# Altium PCB XmasLights.PcbDoc
Units mm, origin at the board's own origin, x right, y up, seen from the top; angles counter-clockwise.
Board outline 80 x 65 mm, 2 copper layers (Top Layer, Bottom Layer), stack 1.57 mm thick; 89 components, 60 nets, 366 pads, 244 vias.
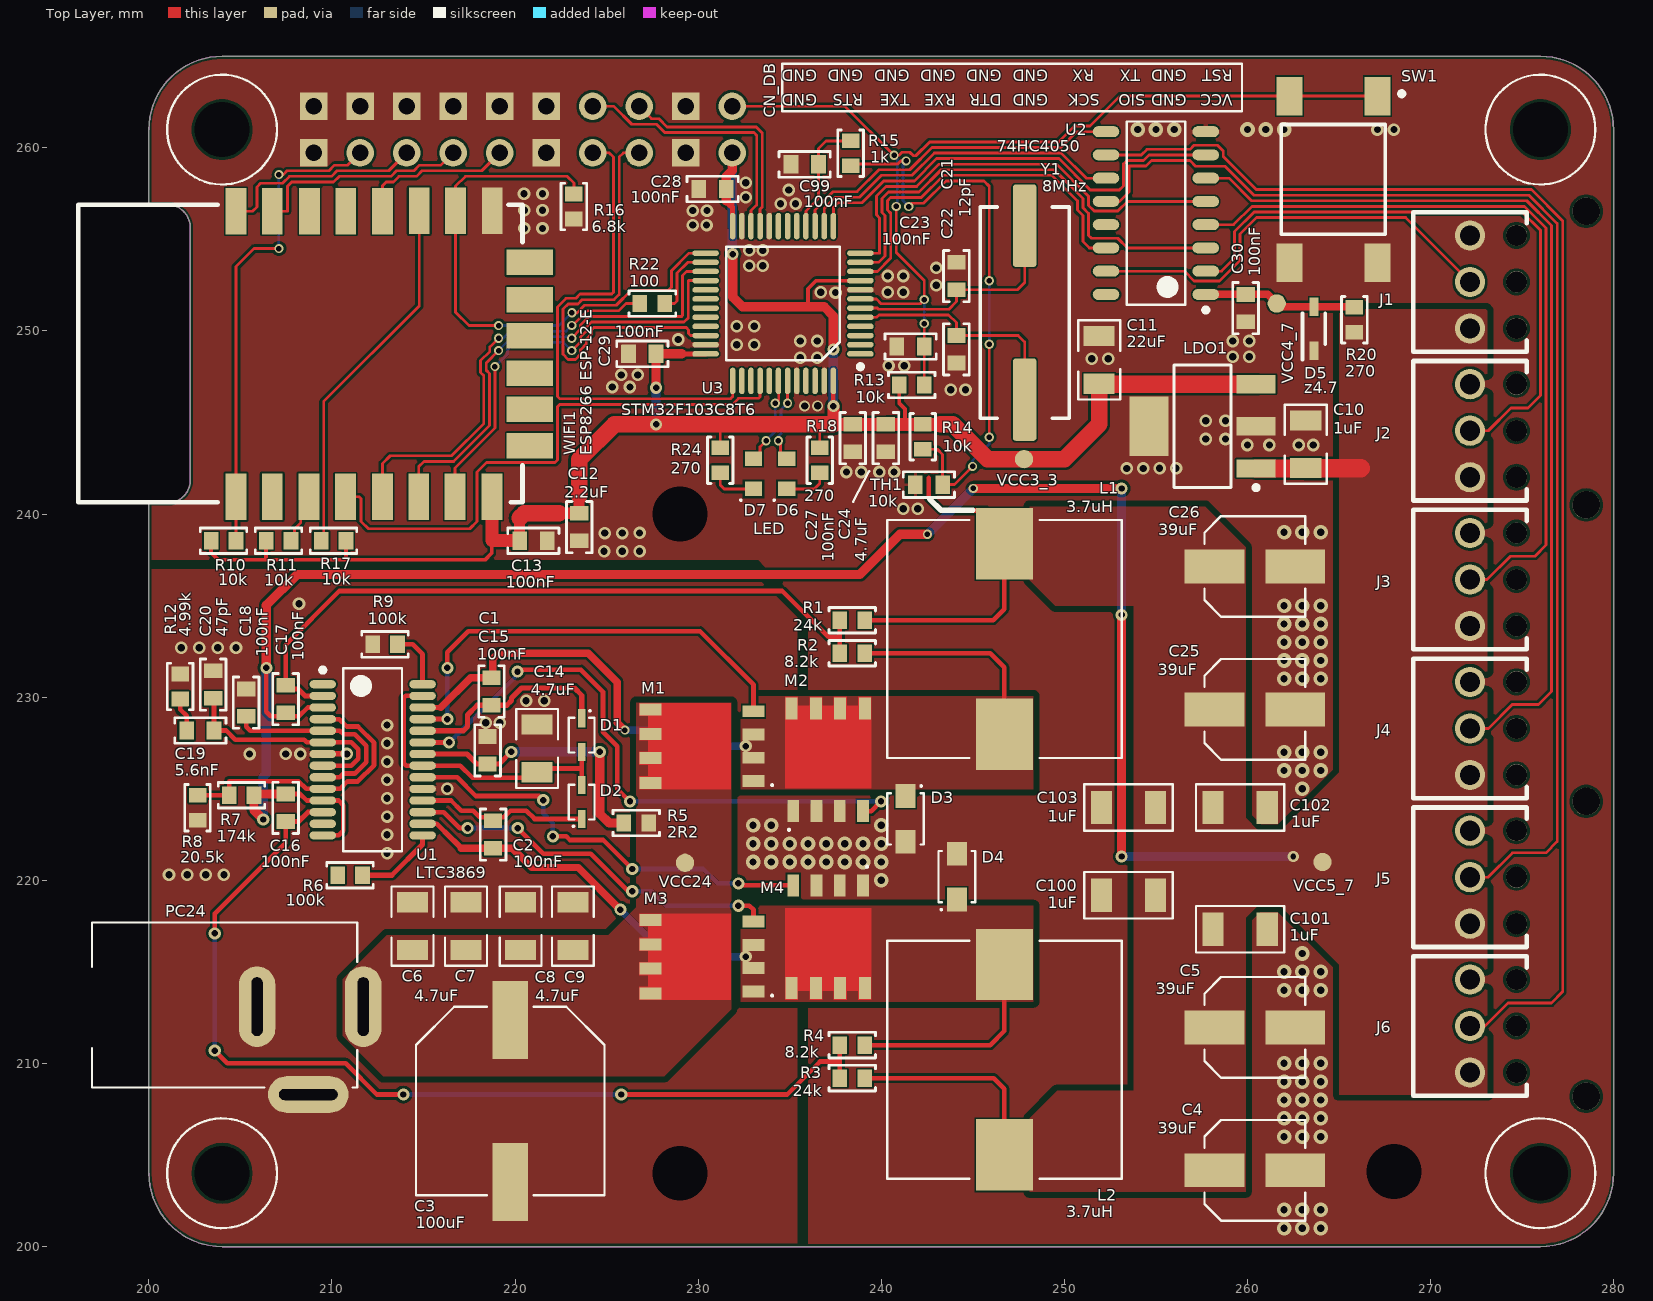
[diagram p0: Top Layer view]
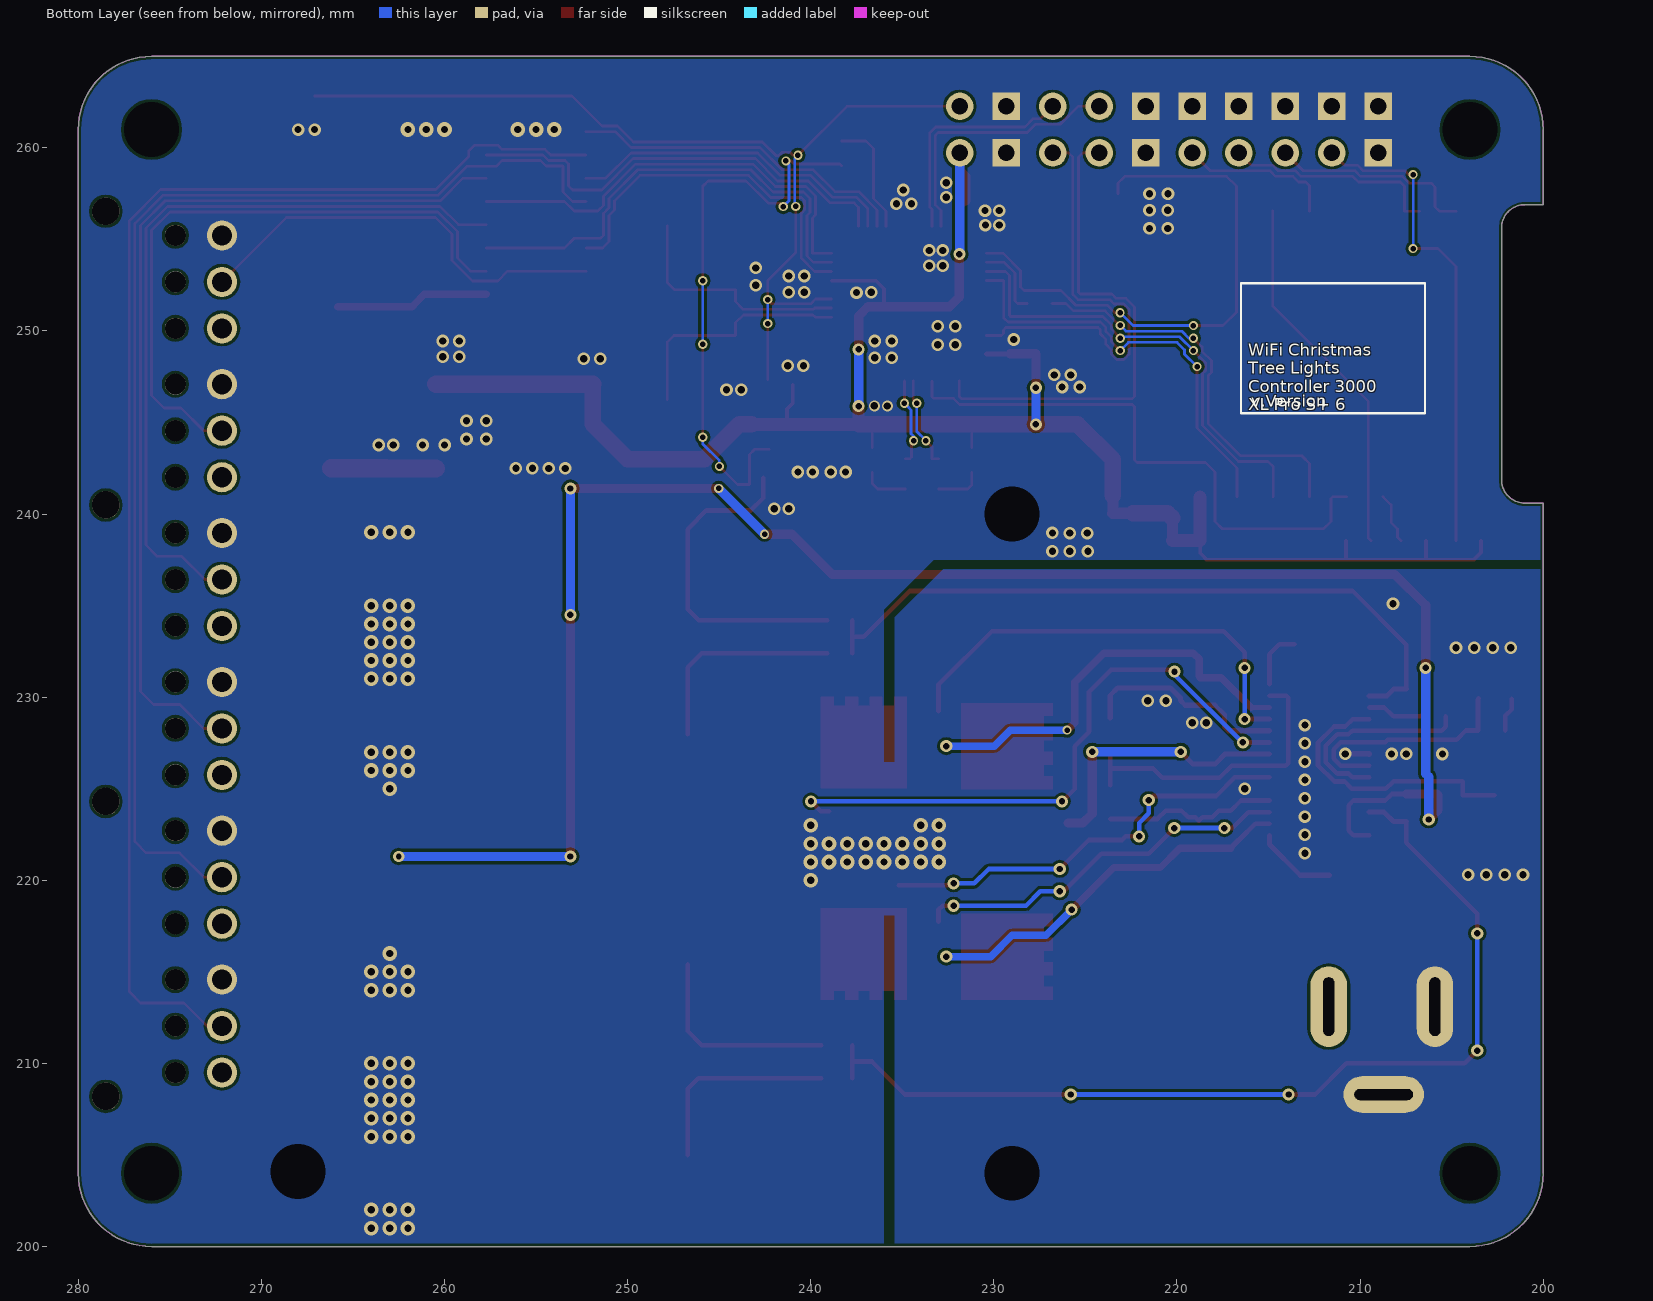
[diagram p1: Bottom Layer view, seen from below]
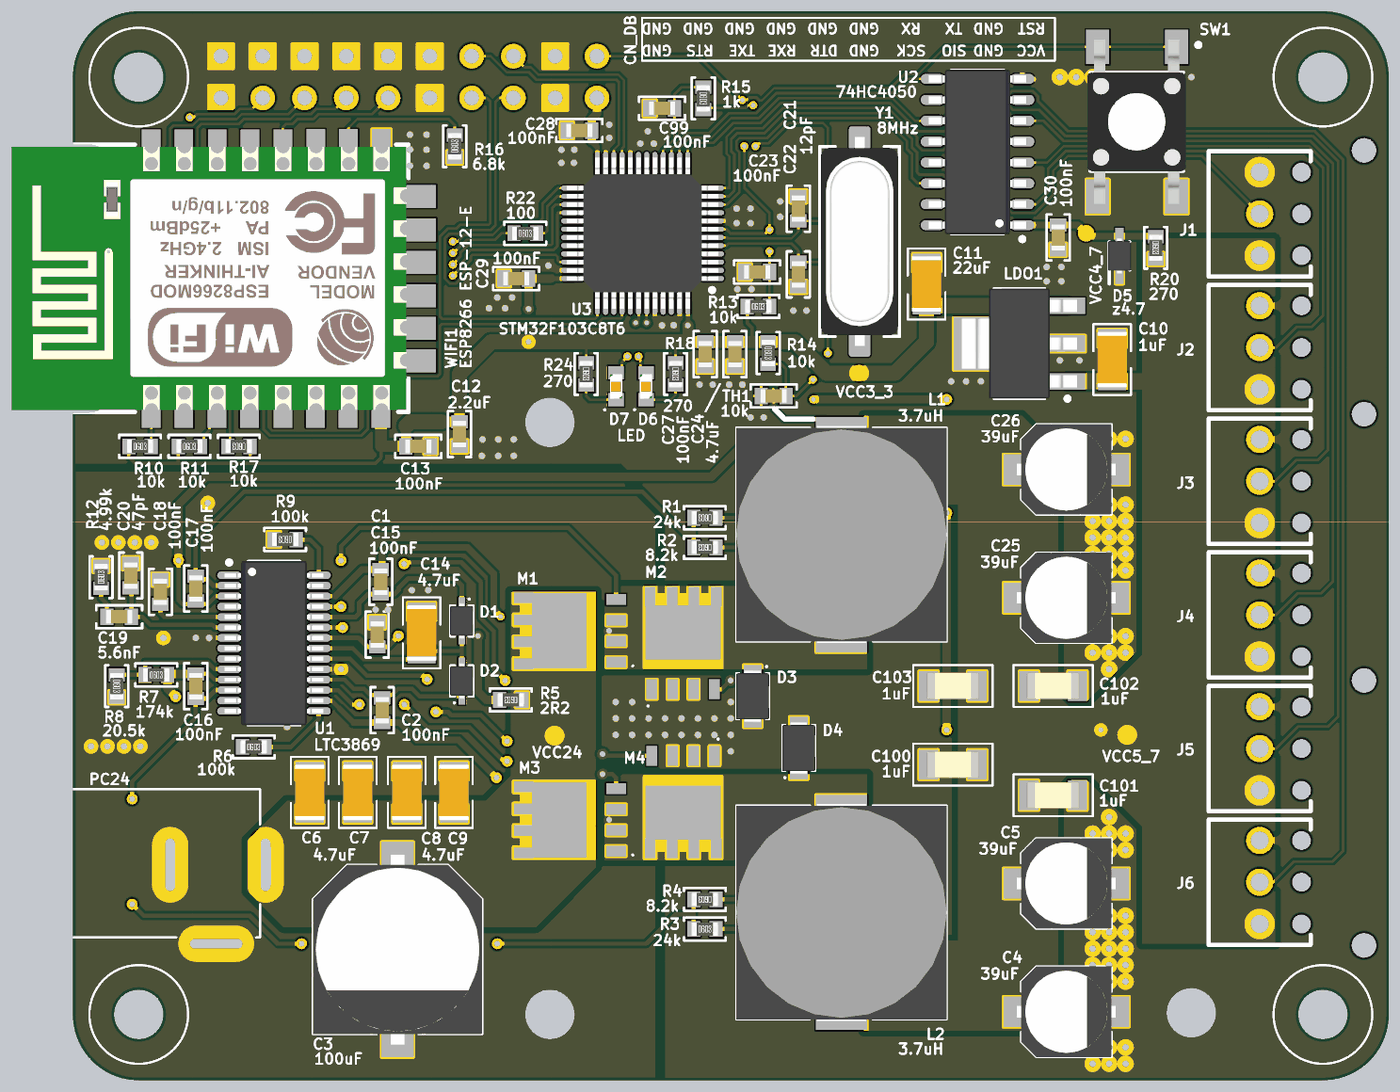
[diagram p2: 3D render of the assembled board from above, using the file's embedded part models]

## Layer stack, top to bottom
Top Solder: solder mask 0.01, Solder Resist, Dk 3.5
Top Layer: signal copper 0.035
Dielectric 1: dielectric 1.5, FR-4, Dk 4.8
Bottom Layer: signal copper 0.035
Bottom Solder: solder mask 0.01, Solder Resist, Dk 3.5

## Board outline
200,204 200,240.6 201,240.6 ccw(c201,241.87) 202.27,241.87 202.27,255.63 ccw(c201,255.63) 201,256.9 200,256.9 200,261 cw(c204,261) 204,265 276,265 cw(c276,261) 280,261 280,204 cw(c276,204) 276,200 204,200 cw(c204,204)

## Design rules (kind name [scope] priority, off if disabled: settings)
Clearance Clearance_VOUT_TOP [(InComponent('L1') OR InComponent('L2')) AND (InNet('VOUT') OR InNet('SW1') OR InNet('SW2')) vs InNet('GND')] p1: gap=0.152 except(0.305: SMDPad-Poly; 0.5: Poly-Poly)
Clearance [All] p2: gap=0.152 except(0.102: SMDPad-Poly; 0.35: Poly-Poly)
HoleSize [All] p1: absolutevalues=TRUE maxlimit=4 minlimit=0.025 maxpercent=80.000 minpercent=20.000
MinimumAnnularRing [All] p1: minimumring=0.076
MinimumSolderMaskSliver [All] p1: minsoldermaskwidth=0.152
NetAntennae NetAntennae_HEAT [InNet('VCC5_7')] p1: netantennaetolerance=1.5
NetAntennae [All] p2: netantennaetolerance=0
PolygonConnect PolygonConnect_TH1 [InComponent('TH1')] p1: connectstyle=Relief reliefconductorwidth=0.152 reliefentries=4 polygonreliefangle="90 Angle" airgapwidth=0.152
PolygonConnect PolygonConnect_J12 [InNet('GND') vs HasFootprint('DC_CON') OR HasFootprint('CAPAE6053X59M') OR InComponent('TP1')] p2: connectstyle=Direct reliefconductorwidth=0.254 reliefentries=4 polygonreliefangle="90 Angle" airgapwidth=0.254
PolygonConnect PolygonConnect_GND_PADS [InNet('GND') vs InComponent('U?')] p3: connectstyle=Relief reliefconductorwidth=0.279 reliefentries=4 polygonreliefangle="90 Angle" airgapwidth=0.102
PolygonConnect PolygonConnect_VIN [InNet('VCC24') or InNet('SW1') or InNet('SW2') or InNet('VCC5_7') or ((IsVia OR IsPad) ANd InNet('GND'))] p4: connectstyle=Direct reliefconductorwidth=0.254 reliefentries=4 polygonreliefangle="90 Angle" airgapwidth=0.152
PolygonConnect [All] p5: connectstyle=Relief reliefconductorwidth=0.254 reliefentries=4 polygonreliefangle="90 Angle" airgapwidth=0.152
RoutingVias [All] p1: holewidth=0.3 width=0.5 viastyle="Through Hole" minholewidth=0.3 minwidth=0.5 maxholewidth=1 maxwidth=1.372
SilkToSilkClearance [All vs False] p1: silktosilkclearance=0.254
SilkToSolderMaskClearance [False] p1: minsilkscreentomaskgap=0.254 clearancetoexposedcopper=TRUE
SolderMaskExpansion SolderMaskExpansion_via [IsVia] p1: expansion=0
SolderMaskExpansion [All] p2: expansion=0.102
Width [All] p1: maxlimit=1.524 minlimit=0.152 preferedwidth=0.152
25 further rules are at their usual default settings.

## Classes and differential pairs
component class PowerBuck: C1 C2 C3 C4 C5 C6 C7 C8 C9 C14 C15 C16 C17 C18 C19 C20 C25 C26 C100 C101 C102 C103 D1 D2 D3 D4 L1 L2 M1 M2 M3 M4 R1 R2 R3 R4 R5 R6 R7 R8 R9 R12 U1
component class XmasLights: C10 C11 C12 C13 C21 C22 C23 C24 C27 C28 C29 C30 C99 CN1 CN2 CN3 CN4 CN5 CN6 CN_DB D5 D6 D7 J1 J2 J3 J4 J5 J6 LDO1 PC24 R10 R11 R13 R14 R15 R16 R17 R18 R20 R22 R24 SW1 TH1 U2 U3 VCC3_3 VCC4_7 VCC5_7 VCC24 WIFI1 Y1

## Components (designator, comment, footprint, x,y, rotation, side; value= is the part's Value field where it differs from the comment)
C1 "100nF" "CAP 0603/1608" 218.716,230.311 r270 top
C2 "100nF" "CAP 0603/1608" 218.8,222.5 r270 top
C3 "100uF" CAPAE115102X102N 219.737,207.948 r270 top
C4 "39uF" CAPAE6053X59M 260.4,204.162 r0 top
C5 "39uF" CAPAE6053X59M 260.4,211.967 r0 top
C6 "4.7uF" CAP_1206 214.4,217.499 r90 top
C7 "4.7uF" CAP_1206 217.321,217.499 r90 top
C8 "4.7uF" CAP_1206 220.3,217.499 r90 top
C9 "4.7uF" CAP_1206 223.164,217.499 r90 top
C10 "1uF" CAP_1206 263.187,243.819 r90 top
C11 "22uF" CAP_1206 251.901,248.419 r90 top
C12 "2.2uF" "CAP 0603/1608" 223.504,239.292 r270 top
C13 "100nF" "CAP 0603/1608" 221,238.542 r0 top
C14 "4.7uF" CAP_1206 221.2,227.2 r90 top
C15 "100nF" "CAP 0603/1608" 218.5,227.1 r90 top
C16 "100nF" "CAP 0603/1608" 207.469,223.961 r270 top
C17 "100nF" "CAP 0603/1608" 207.469,229.9 r90 top
C18 "100nF" "CAP 0603/1608" 205.316,229.7 r90 top
C19 "5.6nF" "CAP 0603/1608" 202.811,228.181 r180 top
C20 "47pF" "CAP 0603/1608" 203.511,230.685 r90 top
C21 "12pF" "CAP 0603/1608" 244.104,253 r270 top
C22 "12pF" "CAP 0603/1608" 244.104,249 r90 top
C23 "100nF" "CAP 0603/1608" 241.6,249.152 r180 top
C24 "4.7uF" "CAP 0603/1608" 240.25,244.15 r270 top
C25 "39uF" CAPAE6053X59M 260.4,229.336 r0 top
C26 "39uF" CAPAE6053X59M 260.4,237.14 r0 top
C27 "100nF" "CAP 0603/1608" 238.446,244.15 r270 top
C28 "100nF" "CAP 0603/1608" 230.79,257.754 r180 top
C29 "100nF" "CAP 0603/1608" 226.95,248.75 r180 top
C30 "100nF" "CAP 0603/1608" 259.9,251.246 r270 top
C99 "100nF" "CAP 0603/1608" 235.82,259.1 r0 top
C100 "1uF" CAP1206 253.5,219.188 r180 top
C101 "1uF" CAP1206 259.6,217.329 r180 top
C102 "1uF" CAP1206 259.6,223.973 r180 top
C103 "1uF" CAP1206 253.5,223.973 r0 top
CN_DB "CONNECTOR" "Edge Connector" 231.86,259.73 r180 top
D1 "SDM10K45" DIOM1713X11N 223.641,227.929 r270 top
D2 "SDM10K45" DIOM1713X11N 223.641,224.275 r90 top
D3 "SDM10K45" DIOM2618X11N 241.326,223.351 r270 top
D4 "SDM10K45" DIOM2618X11N 244.13,220.2 r90 top
D5 "z4.7" SOD2512X110N 263.631,250.127 r90 top
D6 "LED" Chip2PinSM127P600-8N 234.837,242.2 r90 top
D7 "LED" Chip2PinSM127P600-8N 233.021,242.2 r90 top
J1 "7901092" 7901092 274.695,252.681 r90 top
J2 "7901092" 7901092 274.695,244.553 r90 top
J3 "7901092" 7901092 274.695,236.425 r90 top
J4 "7901092" 7901092 274.695,228.297 r90 top
J5 "7901092" 7901092 274.695,220.168 r90 top
J6 "7901092" 7901092 274.695,212.04 r90 top
L1 "3.7uH" INDP130128X62N 246.726,233.18 r90 top
L2 "3.7uH" INDP130128X62N 246.726,210.2 r270 top
LDO1 "LDO" SOT230P700X180-4N 257.544,244.794 r180 top
M1 "MOSFET-N" INF-PG-TDSON-8-1_V 230.2,227.329 r90 top
M2 "MOSFET-N" INF-PG-TDSON-8-1_V 237.096,226.6 r0 top
M3 "MOSFET-N" INF-PG-TDSON-8-1_V 230.2,215.835 r90 top
M4 "MOSFET-N" INF-PG-TDSON-8-1_V 237.096,216.9 r180 top
PC24 "PWR5.5" DC_CON 208.71,208.3 r0 top
R1 "24k" "RES 0603/1608" 238.421,234.204 r180 top
R2 "8.2k" "RES 0603/1608" 238.421,232.4 r180 top
R3 "24k" "RES 0603/1608" 238.421,209.196 r0 top
R4 "8.2k" "RES 0603/1608" 238.421,211 r180 top
R5 "2R2" "RES 0603/1608" 226.625,223.129 r180 top
R6 "100k" "RES 0603/1608" 210.99,220.275 r0 top
R7 "174k" "RES 0603/1608" 205.064,224.646 r0 top
R8 "20.5k" "RES 0603/1608" 202.66,223.966 r270 top
R9 "100k" "RES 0603/1608" 212.9,232.883 r180 top
R10 "10k" "RES 0603/1608" 204.08,238.542 r0 top
R11 "10k" "RES 0603/1608" 207.084,238.542 r0 top
R12 "4.99k" "RES 0603/1608" 201.707,230.585 r90 top
R13 "10k" "RES 0603/1608" 241.67,247.05 r0 top
R14 "10k" "RES 0603/1608" 242.269,244.22 r270 top
R15 "1k" "RES 0603/1608" 238.324,259.704 r270 top
R16 "6.8k" "RES 0603/1608" 223.214,256.798 r90 top
R17 "10k" "RES 0603/1608" 210.088,238.542 r180 top
R18 "270" "RES 0603/1608" 236.641,242.945 r270 top
R20 "270" "RES 0603/1608" 265.836,250.617 r270 top
R22 "100" "RES 0603/1608" 227.5,251.5 r0 top
R24 "270" "RES 0603/1608" 231.204,242.945 r270 top
SW1 "SWITCH" FSM-SWITCH 264.168,258.916 r0 top
TH1 "10k" "CAP 0603/1608" 242.6,241.609 r0 top
U1 "LTC3869" SOP64P600X175-28N 212.223,226.579 r0 top
U2 "74HC4050" SOIC127P600X175-16N 255,256.441 r180 top
U3 "STM32F103C8T6" CQFP50P900X900X160-48N 234.635,251.5 r180 top
VCC3_3 "TESTPOINT" TESTPOINT 247.8,243 r90 top
VCC4_7 "TESTPOINT" TESTPOINT 261.6,251.5 r90 top
VCC5_7 "TESTPOINT" TESTPOINT 264.1,221 r90 top
VCC24 "TESTPOINT" TESTPOINT 229.286,220.954 r90 top
WIFI1 "ESP8266 ESP-12-E" "ESP8266 ESP-12-E" 221.168,257.53 r90 top
Y1 "8MHz" CRYSTAL 247.834,251 r90 top

## Footprints (in the part's own frame and the unit in brackets; to place one, negate y for a bottom-side part, rotate by r counter-clockwise, add the part's x,y. Pads: shape width x height; smd on the part's side, far side on the other; paste and mask are expansions set on the pad)
7901092 [mm]
  round 1.65 hole 1.1: 1(-2.54,2.54) 2(0,2.54) 3(2.54,2.54)
  round 1.15 hole 1.15 unplated: 4(-2.54,0) 5(0,0) 6(2.54,0)
  silkscreen extent -3.81,-0.56 3.81,5.64
CAP1206 [mm]
  rrect1% 1.16x1.82 smd: 1(1.475,0) 2(-1.475,0)
  silkscreen extent -2.41,-1.27 2.41,1.27, body extent -1.6,-0.81 1.6,0.81, height 0.57
"CAP 0603/1608" [mm] "Chip Capacitor, 2-Leads, Body 1.60x0.80mm, IPC Medium Density"
  rrect1% 0.8x1 smd: 1(-0.75,0) 2(0.75,0)
  silkscreen extent -1.4,-0.7 1.4,0.7, body extent -0.8,-0.41 0.8,0.41, height 0.82
CAP_1206 [mm] "Chip Capacitor, 2-Leads, Body 3.20x1.60mm, IPC High Density"
  rrect1% 1.1x1.7 smd: 1(-1.3,0) 2(1.3,0)
  silkscreen extent -2.16,-1.14 2.16,1.14, body extent -1.7,-0.9 1.7,0.9, height 1
CAPAE6053X59M [mm] "Aluminum Electrolytic Capacitor, Body 5.30x5.30x5.90mm, IPC Low Density"
  rect 3.25x1.85 smd: 1(-2.2,0) 2(2.2,0)
  silkscreen extent -2.75,-2.75 2.75,2.75, body extent -3,-2.75 3,2.75, height 5.9
CAPAE115102X102N [mm] "Aluminum Electrolytic Capacitor, Body 10.25x10.25x10.20mm, IPC Medium Density"
  rect 4.25x1.95 smd: 1(-4.425,0) 2(4.425,0)
  silkscreen extent -5.15,-5.15 5.15,5.15, body extent -5.77,-5.15 5.77,5.15, height 10.2
Chip2PinSM127P600-8N [mm] "SMT LED"
  rect 0.8x0.95 smd: 1(-0.825,0) 2(0.825,0)
  silkscreen extent -1.49,0.64 -1.39,0.74, body extent -0.77,-0.38 0.74,0.38, height 0.17
CQFP50P900X900X160-48N [mm] "CQFP, 48-Leads, Body 9.00x9.00mm, Pitch 0.50mm, IPC Medium Density"
  oval 1.45x0.3 smd: 1(-4.225,2.75) 2(-4.225,2.25) 3(-4.225,1.75) 4(-4.225,1.25) 5(-4.225,0.75) 6(-4.225,0.25) 7(-4.225,-0.25) 8(-4.225,-0.75) 9(-4.225,-1.25) 10(-4.225,-1.75) 11(-4.225,-2.25) 12(-4.225,-2.75) 25(4.225,-2.75) 26(4.225,-2.25) 27(4.225,-1.75) 28(4.225,-1.25) 29(4.225,-0.75) 30(4.225,-0.25) 31(4.225,0.25) 32(4.225,0.75) 33(4.225,1.25) 34(4.225,1.75) 35(4.225,2.25) 36(4.225,2.75)
  oval 0.3x1.45 smd: 13(-2.75,-4.225) 14(-2.25,-4.225) 15(-1.75,-4.225) 16(-1.25,-4.225) 17(-0.75,-4.225) 18(-0.25,-4.225) 19(0.25,-4.225) 20(0.75,-4.225) 21(1.25,-4.225) 22(1.75,-4.225) 23(2.25,-4.225) 24(2.75,-4.225) 37(2.75,4.225) 38(2.25,4.225) 39(1.75,4.225) 40(1.25,4.225) 41(0.75,4.225) 42(0.25,4.225) 43(-0.25,4.225) 44(-0.75,4.225) 45(-1.25,4.225) 46(-1.75,4.225) 47(-2.25,4.225) 48(-2.75,4.225)
  silkscreen extent -4.35,-3.1 3.1,3.57, body extent -4.6,-4.6 4.6,4.6, height 1.45
CRYSTAL [mm] "Crystal, 2-Leads, Body 4.70x11.40mm, Pitch 8.80mm, IPC Medium Density"
  rrect25% 4.5x1.3 smd: 1(-4.75,0) 2(4.75,0)
  silkscreen extent -5.77,-2.43 5.77,2.43, body extent -6.35,-2.35 6.35,2.35, height 4.2
DC_CON [mm]
  oval 2x4.4 hole 0.6 slot 3.2 at 90 deg paste-2.54: 1(3,4.8) 2(-2.8,4.8)
  oval 4.4x2 hole 0.6 slot 3.2 at 0 deg paste-2.54: 3(0,0)
  silkscreen extent -11.81,0.38 2.67,9.4, body extent -11.83,0.43 2.67,9.43, height 10
DIOM1713X11N [mm] "Molded Diode, 2-Leads, Body 1.70x1.30mm, IPC Medium Density"
  rect 1x0.4 smd: 1(-0.925,0) 2(0.925,0)
  silkscreen extent -1.37,-0.7 0.95,0.7, body extent -1.12,-0.7 1.12,0.7, height 1.1
DIOM2618X11N [mm] "Molded Diode, 2-Leads, Body 2.60x1.80mm, IPC Medium Density"
  rect 1.3x1.1 smd: 1(-1.25,0) 2(1.25,0)
  silkscreen extent -1.85,-1 1.4,1, body extent -1.62,-1 1.62,1, height 1.1
"Edge Connector" [mm]
  rrect100% 1.5x1.5 hole 0.9: 1(0,-2.54) 2(5.08,-2.54) 3(7.62,-2.54) 4(0,0) 5(5.08,0) 6(7.62,0) 7(12.7,0) 8(15.24,0) 9(17.78,0) 10(20.32,0)
  rrect1% 1.5x1.5 hole 0.9: 11(2.54,0) 11(2.54,-2.54) 11(10.16,-2.54) 11(10.16,0) 11(12.7,-2.54) 11(15.24,-2.54) 11(17.78,-2.54) 11(20.32,-2.54) 11(22.86,-2.54) 11(22.86,0)
"ESP8266 ESP-12-E" [mil] "ESP8266 ESP-12-E"
  rrect1% 100x45 smd: 1(-653,646) 2(-653,568) 3(-653,489) 4(-653,411) 5(-653,331) 6(-653,253) 7(-653,175) 8(-653,96) 15(-38,95) 16(-38,174) 17(-38,252) 18(-39,331) 19(-39,410) 20(-39,488) 21(-39,568) 22(-39,646)
  rrect1% 55x100 smd: 9(-543,14) 10(-465,14) 11(-387,14) 12(-307,14) 13(-229,14) 14(-149,14)
  silkscreen extent -665,30 -25,985, body extent -660,35 -30,980, height 118
FSM-SWITCH [mm]
  rect 1.4x2.1 smd: 1(-1.869,-5.185) 2(-1.869,3.915) 3(2.931,-5.185) 4(2.931,3.915)
  silkscreen extent -2.32,-3.63 4.38,4.16, body extent -2.49,-5.63 3.51,4.37, height 5.07
INDP130128X62N [mm] "Precision Wire Wound Inductor, 2-Leads, Body 13.00x12.80mm, IPC Medium Density"
  rect 3.9x3.1 smd: 1(-5.2,0) 2(5.2,0)
  silkscreen extent -6.5,-6.4 6.5,6.4, body extent -6.6,-6.4 6.6,6.4, height 6.3
INF-PG-TDSON-8-1_V [mm] "TDSON, 8-Leads, Body 6.15x5.15mm, Pitch 1.27mm"
  rect 0.65x1.2 smd: 1(-1.905,-2.825) 2(-0.635,-2.825) 3(0.635,-2.825) 4(1.905,-2.825) 5(2.007,2.794) 6(0.66,2.794) 7(-0.66,2.794) 8(-2.007,2.794)
  Top Layer region: -2.35,2.925 -2.35,-1.575 2.35,-1.575 2.35,2.925
  Top Layer region: -2.35,2.925 -1.65,2.925 -1.65,3.425 -2.35,3.425
  Top Layer region: 1.65,2.925 2.35,2.925 2.35,3.425 1.65,3.425
  Top Layer region: -1.015,2.925 -0.315,2.925 -0.315,3.425 -1.015,3.425
  Top Layer region: 0.315,2.925 1.015,2.925 1.015,3.425 0.315,3.425
  silkscreen extent -2.23,-3.94 -2.03,-3.74, body extent -2.58,-3.08 2.58,3.08, height 1
"RES 0603/1608" [mm] "Chip Resistor, 2-Leads, Body 1.60x0.80mm, IPC Medium Density"
  rrect1% 0.8x0.95 smd: 1(-0.68,0) 2(0.68,0)
  silkscreen extent -1.27,-0.7 1.27,0.7, body extent -0.8,-0.4 0.8,0.4, height 0.45
SOD2512X110N [mm]
  rect 1x0.5 smd: 1(-1.2,0) 2(1.2,0)
  silkscreen extent -1.7,-0.63 0.85,0.63, body extent -1.12,-0.7 1.12,0.7, height 1.1
SOIC127P600X175-16N [mm] "SOIC, 16-Leads, Body 9.90x3.90mm, Pitch 1.27mm, IPC Medium Density"
  oval 1.45x0.6 smd: 1(-2.725,4.445) 2(-2.725,3.175) 3(-2.725,1.905) 4(-2.725,0.635) 5(-2.725,-0.635) 6(-2.725,-1.905) 7(-2.725,-3.175) 8(-2.725,-4.445) 9(2.725,-4.445) 10(2.725,-3.175) 11(2.725,-1.905) 12(2.725,-0.635) 13(2.725,0.635) 14(2.725,1.905) 15(2.725,3.175) 16(2.725,4.445)
  silkscreen extent -2.85,-5 1.6,5.42, body extent -3,-5 3,5, height 1.75
SOP64P600X175-28N [mm] "SOP, 28-Leads, Body 9.89x3.90mm, Pitch 0.64mm, IPC Medium Density"
  oval 1.45x0.45 smd: 1(-2.725,4.127) 2(-2.725,3.492) 3(-2.725,2.857) 4(-2.725,2.222) 5(-2.725,1.587) 6(-2.725,0.953) 7(-2.725,0.318) 8(-2.725,-0.318) 9(-2.725,-0.953) 10(-2.725,-1.587) 11(-2.725,-2.222) 12(-2.725,-2.857) 13(-2.725,-3.492) 14(-2.725,-4.127) 15(2.725,-4.127) 16(2.725,-3.492) 17(2.725,-2.857) 18(2.725,-2.222) 19(2.725,-1.587) 20(2.725,-0.953) 21(2.725,-0.318) 22(2.725,0.318) 23(2.725,0.953) 24(2.725,1.587) 25(2.725,2.222) 26(2.725,2.857) 27(2.725,3.492) 28(2.725,4.127)
  silkscreen extent -2.85,-5 1.6,5.03, body extent -3,-5 3,5, height 1.75
SOT230P700X180-4N [mm] "SOT223, 4-Leads, Body 6.50x7.00mm (avg), Pitch 2.30mm, IPC Medium Density"
  rrect1% 2.15x1 smd: 1(-2.925,2.3) 2(-2.925,0) 3(-2.925,-2.3)
  rrect1% 2.15x3.25 smd: 4(2.925,0)
  silkscreen extent -3.05,-3.35 1.55,3.47, body extent -3.5,-3.35 3.5,3.35, height 1.8
TESTPOINT [mm]
  round 1 smd paste-10: 1(0,0)

## Part data
C1 C2 C6 C7 C8 C9 C10 C11 C12 C13 C14 C15 C16 C17 C18 C19 C20 C21 C22 C23 C24 C27 C28 C29 C30 C99 C100 C101 C102 C103: library part CAP, "Capacitor"
C3 C4 C5 C25 C26: library part "E CAP"
CN_DB: "Debug Connector"
D1 D2 D3 D4: library part "D Schottky"
D5: library part DIODE
J1 J2 J3 J4 J5 J6: "3 way PCB terminal block 2.54mm RS Pro 2.54mm Pitch Straight PCB Terminal Block with Screw Termination, Through Hole, 3 Way"
L1 L2: library part Inductor, "Inductor"
LDO1: "LDO Voltage Regulator"
PC24: library part PWR2.5, "Low Voltage Power Supply Connector"
R1 R2 R3 R4 R5 R6 R7 R8 R9 R10 R11 R12 R13 R14 R15 R16 R17 R18 R20 R22 R24: library part RES, "Resistor"
SW1: library part 4-1437565-1, "6x6mm SMD tactile switch,5mm H 1.6N Black Button Tactile Switch, SPST-NO 0.05 A@ 12 V dc 1.4mm"
TH1: library part THERMISTOR
U3: "Medium-density performance line ARM-based 32-bit MCU with 64 or 128 KB Flash, USB, CAN, 7 timers, 2 ADCs, 9 com. interfaces"
Y1: library part CRYSTAL, "Cheapo SMT Crystal"

## Free pads (board coordinates)
  round 1.5 hole 1.5 unplated: 0(278.5,208.2) 0(278.5,224.309) 0(278.5,240.5) 0(278.5,256.539)
  round 1.5 on Top Paste: 1(278.5,256.539) 2(278.5,240.5) 3(278.5,224.309) 4(278.5,208.2)
  round 1.524 hole 3 unplated paste-10 mask-10: A(268,204.1) B(229,204) B(229,240)
  round 1.524 hole 3 unplated: ""(204,204) ""(204,261) ""(276,204) ""(276,261)

## Via types
v1: diameter 0.8, hole 0.4, Top Layer to Bottom Layer, 59 vias
v2: diameter 0.686, hole 0.4, Top Layer to Bottom Layer, tented top, 52 vias
v3: diameter 0.686, hole 0.4, Top Layer to Bottom Layer, tented both sides, 39 vias
v4: diameter 0.66, hole 0.35, Top Layer to Bottom Layer, 22 vias
v5: diameter 0.8, hole 0.4, Top Layer to Bottom Layer, tented top, 20 vias
v6: diameter 0.5, hole 0.3, Top Layer to Bottom Layer, 20 vias
v7: diameter 0.686, hole 0.4, Top Layer to Bottom Layer, 11 vias
v8: diameter 0.66, hole 0.35, Top Layer to Bottom Layer, tented top, 7 vias
v9: diameter 0.5, hole 0.3, Top Layer to Bottom Layer, tented both sides, 4 vias
v10: diameter 0.5, hole 0.3, Top Layer to Bottom Layer, tented top, 3 vias
v11: diameter 0.66, hole 0.356, Top Layer to Bottom Layer, tented top, 3 vias
v12: diameter 0.6, hole 0.4, Top Layer to Bottom Layer, tented both sides, 2 vias
v13: diameter 0.61, hole 0.305, Top Layer to Bottom Layer, 1 vias
v14: diameter 0.66, hole 0.356, Top Layer to Bottom Layer, 1 vias

## Nets (pads, with @x,y where several pads share a name; then routed paths per layer and width w, separated by ;. In a path a pad name is that pad's centre, name@x,y a point inside that pad or via, vN(x,y) a via of type N, cw(c..) or ccw(c..) an arc to the next point about the centre after c; other vN are vias at no path point)
BG1: M2.4 U1.23 | length 33.7
  Top Layer w0.254: v4(220.135,231.4) 220.135,231.354 220.28,231.5 223.6,231.5 224.8,230.3 224.8,228.109 225.59,227.319 225.59,224.986 v4@226.276,224.3 ; M2.4 239.45,223.775 v8(239.984,224.309)
  Top Layer w0.279: U1.23 v4(216.4,227.531)
  Bottom Layer w0.254: v4(216.4,227.531) 216.437,227.531 220.135,231.229 v4(220.135,231.4) ; v4(226.276,224.309) v8(239.984,224.309)
BG2: M4.4 U1.20 | length 23.5
  Top Layer w0.254: U1.20 215.526,225.626 215.526,225.622 216.844,225.622 217.866,224.6 221.32,224.6 v4(221.54,224.38) ; v4(222.064,222.4) 222.8,222.4 223,222.2 224.818,222.2 v4(226.4,220.618) ; v8(232.2,219.834) 232.309,219.725 M4.4
  Bottom Layer w0.254: v4(221.54,224.38) 221.54,223.653 222.064,223.129 v4(222.064,222.4) ; v4(226.4,220.618) 230.285,220.618 231.069,219.834 v8(232.2,219.834)
BOOST1: C1.2 D1.1 U1.24 | length 11.5
  Top Layer w0.279: U1.24 217.186,228.166 217.41,228.39 217.41,229.034 217.936,229.561 C1.2 219.546,229.561 219.804,229.819 219.804,229.959 220.345,230.5 223.243,230.5 223.641,230.102 D1.1
BOOST2: C2.1 D2.1 U1.18 | length 9.6
  Top Layer w0.254: U1.18 216.503,224.356 217.06,223.8 217.72,223.8 218.083,223.437 218.613,223.437 C2.1 218.987,223.437 219.387,223.437 219.75,223.8 220.615,223.8 221.065,223.35 D2.1
DTR: CN_DB.7 WIFI1.18 | length 8.5
  Top Layer w0.152: WIFI1.18 212.761,257.935 212.968,258.142 213.354,258.142 213.659,258.447 214.612,258.447 214.916,258.751 218.181,258.751 CN_DB.7
FREQ: R9.1 U1.28 | length 3.2
  Top Layer w0.254: R9.1 214.417,232.883 214.948,232.352 U1.28
GND: C3.2 C4.2 C5.2 C6.2 C7.2 C8.2 C9.2 C10.2 C11.2 C12.2 C13.2 C14.2 C15.2 C18.2 C20.2 C21.1 C22.1 C23.2 C24.2 C25.2 C26.2 C27.2 C28.2 C29.2 C30.2 C99.1 C100.1 C101.2 C102.2 C103.2 CN_DB.11 D3.2 D4.2 D5.1 J1.3 J2.3 J3.3 J4.3 J5.3 J6.3 LDO1.2 LDO1.4 M2.1 M2.2 M2.3 M4.1 M4.2 M4.3 pad.A pad.B PC24.2 PC24.3 R8.2 R9.2 R12.2 R16.1 SW1.1 SW1.3 TH1.1 U1.7 U1.19 U2.8 U3.8 U3.20 U3.23 U3.35 U3.44 U3.47 WIFI1.15 | length 1.3
  Top Layer w0.305: U1.7 209.502,226.9 v2(210.8,226.9) ; v7@216.291,224.991 v7(216.3,225)
  other v1: 262,201 263,201 264,201 262,202 263,202 264,202 262,206 263,206 264,206 262,207 263,207 264,207 262,208 263,208 264,208 262,209 263,209 264,209 262,210 263,210 264,210 262,214 263,214 264,214 262,215 263,215 264,215 263,216 263,225 262,226 263,226 264,226 262,227 263,227 264,227 262,231 263,231 264,231 262,232 263,232 264,232 262,233 263,233 264,233 262,234 263,234 264,234 262,235 263,235 264,235 262,239 263,239 264,239 254,261 255,261 256,261 260,261 261,261 262,261
  other v2: 213.008,221.479 213.008,222.479 213.008,223.479 213.008,224.479 213.008,225.479 213.008,226.479 213.008,227.479 213.008,228.479 220.6,229.8 221.6,229.8 224.86,237.965 225.86,237.965 226.8,237.97 224.9,238.965 225.86,238.965 226.8,238.97 253.4,242.494 254.3,242.494 255.2,242.5 256.1,242.5 260,243.775 261.2,243.775 257.725,244.1 258.8,244.1 257.725,245.1 258.8,245.1 240.4,248.1 241.26,248.1 251.5,248.486 252.4,248.486 235.581,248.545 236.5,248.545 259.2,248.586 260.1,248.586 232.1,249.25 233.06,249.25 235.581,249.455 236.5,249.455 259.2,249.455 260.1,249.455 228.905,249.535 232.1,250.25 233.06,250.25 240.353,252.122 241.2,252.122 243,252.5 240.353,253.004 241.2,253.004 243,253.442 267.1,261 268,261
  other v3: 207.469,226.9 208.28,226.896 218.4,228.612 219.164,228.612 241.2,240.3 242,240.3 238.1,242.3 238.9,242.3 239.9,242.3 240.7,242.3 262.8,243.775 263.6,243.775 243.8,246.798 244.6,246.798 225.3,246.942 226.276,246.942 225.8,247.6 226.7,247.6 237.5,252.1 236.7,252.11 232.787,253.569 233.525,253.569 232.787,254.4 233.525,254.4 220.5,255.6 221.5,255.6 229.7,255.787 230.46,255.787 220.5,256.587 221.5,256.587 229.7,256.579 230.483,256.579 234.5,256.954 235.32,256.954 232.607,257.3 220.489,257.5 221.5,257.5 234.951,257.7 232.607,258.104
  other v5: 240,220 233,221 234,221 235,221 236,221 237,221 238,221 239,221 240,221 233,222 234,222 235,222 236,222 237,222 238,222 239,222 240,222 233,223 234,223 240,223
  other v7: 201.1,220.3 202.1,220.3 203.1,220.3 204.1,220.3 205.5,226.896 201.761,232.7 202.761,232.7 203.761,232.7 204.761,232.7 208.2,235.1
  other v12: 235.82,245.9 236.525,245.91
GPIO2: R17.2 WIFI1.17 | length 20.2
  Top Layer w0.152: R17.2 209.548,238.682 209.548,246.148 214.767,251.367 WIFI1.17
HD0: J2.2 U2.2 | length 34.5
  Top Layer w0.152: U2.2 258.577,253.266 259.295,253.984 259.295,255.428 260.369,256.501 274.999,256.501 276,255.5 276,246.471 275.329,245.8 274.4,245.8 273.153,244.553 J2.2
HD1: J3.2 U2.4 | length 41.7
  Top Layer w0.152: U2.4 259.242,255.806 260.242,256.806 275.125,256.806 276.305,255.626 276.305,238.305 275.7,237.7 274.364,237.7 273.089,236.425 J3.2
HD2: J4.2 U2.6 | length 50.7
  Top Layer w0.152: U2.6 258.992,258.346 260.227,257.111 275.251,257.111 276.61,255.752 276.61,230.31 275.9,229.6 274.46,229.6 273.157,228.297 J4.2
HD3: J6.2 U2.10 | length 75
  Top Layer w0.152: U2.10 254.2,259.616 254.505,259.921 256.857,259.921 257.081,260.145 258.369,260.145 258.679,259.835 258.679,259.521 260.479,257.721 275.504,257.721 277.219,256.005 277.219,213.919 276.6,213.3 274.231,213.3 272.971,212.04 J6.2
HD4: J5.2 U2.12 | length 67.1
  Top Layer w0.152: U2.12 253.016,257.076 253.533,257.593 253.533,259.002 253.538,259.007 254.453,259.007 254.757,259.311 256.857,259.311 257.169,259 258.769,259 260.353,257.416 275.377,257.416 276.914,255.879 276.914,222.114 276.3,221.5 274.47,221.5 273.138,220.168 J5.2
HD5: J1.2 U2.15 | length 23.8
  Top Layer w0.152: U2.15 256.552,253.266 257.081,252.738 258.48,252.738 259.6,253.858 259.6,255.302 260.495,256.197 268.64,256.197 J1.2
INTVCC: C14.1 D1.2 D2.2 U1.21 U1.27 | length 16.7
  Top Layer w0.254: U1.27 214.027,230.071 213.916,229.96 213.916,226.4 214.054,226.261 U1.21 217.014,226.261 217.675,225.6 220.799,225.6 221.301,226.102 223.641,226.102 ; D2.2@223.641,225.194 D2.2 223.641,226.102 ; D1.2@223.641,227.029 D1.2 223.641,226.102
ITH: C19.1 C20.1 U1.6 U1.8 | length 12.7
  Top Layer w0.254: C20.1 203.561,229.885 C19.1 204.219,228.181 204.719,227.681 208.478,227.681 208.628,227.531 U1.6 209.502,227.535 211.063,227.535 211.435,227.163 211.435,226.637 211.06,226.261 U1.8
LD0: U2.3 U3.11 | length 25.8
  Top Layer w0.152: U3.11 239.859,253.75 240.212,254.103 240.212,256.302 240.038,256.476 240.038,257.238 240.388,257.588 242.06,257.588 243.277,258.805 249.445,258.805 251.017,257.233 251.017,256.731 251.321,256.426 251.321,255.225 251.482,255.065 252.919,255.065 253.448,254.536 U2.3
LD1: U2.5 U3.12 | length 24.5
  Top Layer w0.152: U3.12 239.907,254.25 239.907,256.175 239.733,256.349 239.733,257.364 240.262,257.893 241.934,257.893 243.151,259.11 249.572,259.11 251.321,257.36 251.321,256.857 251.631,256.548 252.919,256.548 253.448,257.076 U2.5
LD2: U2.7 U3.13 | length 24.7
  Top Layer w0.152: U3.13 237.385,256.753 237.632,257 238.938,257 240.135,258.197 241.808,258.197 243.025,259.414 249.698,259.414 251.412,257.7 253,257.7 253.229,257.929 253.229,259.129 253.411,259.311 254.326,259.311 254.631,259.616 U2.7
LD3: U2.9 U3.15 | length 18.5
  Top Layer w0.152: U3.15 236.385,256.615 237.38,257.61 238.685,257.61 239.883,258.807 241.555,258.807 242.772,260.024 249.816,260.024 250.678,260.886 U2.9
LD4: U2.11 U3.14 | length 18.2
  Top Layer w0.152: U3.14 236.885,256.684 237.506,257.305 238.812,257.305 240.009,258.502 241.681,258.502 242.898,259.719 249.824,259.719 251.197,258.346 U2.11
LD5: U2.14 U3.10 | length 20.4
  Top Layer w0.152: U3.10 239.79,253.25 240.517,253.976 240.517,256.428 240.343,256.602 240.343,257.112 240.514,257.283 242.186,257.283 243.403,258.5 249.319,258.5 250.712,257.107 250.712,256.605 251.017,256.3 251.017,254.883 251.364,254.536 U2.14
LED0: D6.2 U3.43 | length 4.8
  Top Layer w0.152: v6(234.385,244.009) 234.5,243.894 234.5,243.11 234.585,243.025 D6.2 ; v10(234.885,246.057) U3.43
  Bottom Layer w0.152: v6(234.385,244.009) 234.385,244.255 234.518,244.387 234.518,245.685 234.691,245.859 234.691,245.864 v10(234.885,246.057)
LED1: D7.2 U3.42 | length 5
  Top Layer w0.152: D7.2 233.377,243.025 233.377,243.673 v6(233.713,244.009) ; v10(234.213,246.057) 234.4,246.245 234.4,247.26 U3.42
  Bottom Layer w0.152: v6(233.713,244.009) 233.713,244.013 234.213,244.513 v10(234.213,246.057)
NetC19_2: C19.2 R12.1 | length 1.9
  Top Layer w0.254: R12.1 201.707,229.329 202.061,228.975 C19.2
NetD6_1: D6.1 R18.2 | length 2.5
  Top Layer w0.152: D6.1 236.342,241.375 236.641,241.674 R18.2
NetD7_1: D7.1 R24.2 | length 2.6
  Top Layer w0.152: R24.2 231.204,241.595 231.424,241.375 D7.1
NetR11_2: R11.2 WIFI1.3 | length 2.8
  Top Layer w0.152: R11.2 207.959,238.737 207.959,239.195 208.3,239.536 208.3,240.496 WIFI1.3
NetR14_2: R14.2 R15.2 TH1.2 | length 31.5
  Top Layer w0.152: R15.2 238.421,259.121 240.898,259.121 241.062,259.286 v6(241.357,259.286) ; v6(241.5,256.798) 241.68,256.978 242.313,256.978 243.53,258.195 245.612,258.195 245.9,257.907 v6(245.9,252.745) ; R14.2 243.06,243.54 243.35,243.25 TH1.2 244.001,241.609 v6(244.992,242.6) ; v6(245.9,244.2) v6(245.9,249.278)
  Bottom Layer w0.152: v6(241.357,259.286) 241.183,259.112 241.183,257.115 v6(241.5,256.798) ; v6(244.992,242.6) 244.992,242.93 245.9,243.837 v6(245.9,244.2) ; v6(245.9,249.278) v6(245.9,252.745)
OSC_IN: C22.2 U3.5 Y1.1 | length 13.2
  Top Layer w0.152: U3.5 239.747,250.75 239.876,250.879 243.68,250.879 244.104,250.454 C22.2 244.111,249.756 247.477,249.756 247.834,249.4 Y1.1
OSC_OUT: C21.2 U3.6 Y1.2 | length 13.1
  Top Layer w0.152: U3.6 239.785,251.25 239.852,251.183 243.683,251.183 244.104,251.604 C21.2 247.45,252.25 247.834,252.634 Y1.2
PGOOD: R6.2 U1.15 | length 4.5
  Top Layer w0.279: R6.2 213.265,220.275 214.948,221.958 U1.15
RQ: U3.40 WIFI1.4 | length 31.2
  Top Layer w0.152: WIFI1.4 211.492,240.944 211.589,240.847 211.589,239.604 211.993,239.2 217.525,239.2 217.93,239.605 217.93,242.305 218.435,242.81 222.173,242.81 222.311,242.949 222.311,245.863 222.439,245.99 231.878,245.99 232.209,246.321 233.3,246.321 233.385,246.407 U3.40
RST1: C23.1 CN_DB.1 R13.2 SW1.2 SW1.4 U3.7 | length 54.5
  Top Layer w0.152: CN_DB.1 238.03,262.27 v6(240.7,259.6) 240.963,259.6 241.127,259.764 241.555,259.764 241.751,259.568 241.885,259.568 242.646,260.329 249.69,260.329 250.552,261.191 251.407,261.191 253.048,262.831 SW1.2 SW1.4 ; U3.7 239.734,251.75 239.996,251.488 242.127,251.488 v6(242.35,251.711) 242.35,252.75 240.821,254.279 v6(240.821,256.8) ; R13.2@242.35,247.348 C23.1 v6(242.35,250.4)
  Bottom Layer w0.152: v6(240.7,259.6) 240.878,259.422 240.878,256.857 v6(240.821,256.8) ; v6(242.35,250.4) v6(242.35,251.711)
RTS: CN_DB.10 R10.2 WIFI1.1 | length 26.7
  Top Layer w0.152: R10.2 WIFI1.1 204.76,253.512 205.747,254.5 v10(207.1,254.5) ; v6(207.1,258.545) 207.346,258.545 207.552,258.751 209.84,258.751 210.145,259.056 210.866,259.056 CN_DB.10
  Bottom Layer w0.152: v10(207.1,254.5) v6(207.1,258.545)
RX0: CN_DB.8 WIFI1.21 | length 12
  Top Layer w0.152: WIFI1.21 207.566,256.539 207.566,257.903 207.804,258.142 210.093,258.142 210.398,258.447 213.228,258.447 213.532,258.751 214.485,258.751 214.79,259.056 215.946,259.056 CN_DB.8
RX1: CN_DB.3 U3.22 | length 14.7
  Top Layer w0.152: CN_DB.3 225.396,262.27 226.375,261.291 227.723,261.291 228.176,260.838 233.048,260.838 233.195,260.69 233.195,256.888 232.885,256.578 U3.22
SENSE1+: C17.2 R1.2 R2.2 U1.2 | length 38.9
  Top Layer w0.254: C17.2@207.469,230.45 C17.2 207.469,232.869 210.4,235.8 234.6,235.8 237.1,233.3 237.741,233.3 ; R2.2 237.741,233.3 ; R1.2 237.741,233.3
  Top Layer w0.279: C17.2@207.469,230.45 208.166,230.45 208.544,230.071 U1.2
SENSE2+: C16.2 R3.1 R4.2 U1.12 | length 54
  Top Layer w0.254: v4(203.6,210.7) 204.286,210.014 210.744,210.014 212.458,208.3 v4(213.9,208.3) ; v4(203.6,217.1) 203.6,218.184 207.469,222.053 C16.2 ; v4(225.8,208.3) 234.855,208.3 236.655,210.1 237.741,210.1 ; R3.1 237.741,210.1 ; R4.2 237.741,210.1
  Top Layer w0.279: C16.2 208.177,223.211 208.688,223.721 U1.12
  Bottom Layer w0.254: v4(203.6,210.7) v4(203.6,217.1) ; v4(213.9,208.3) v4(225.8,208.3)
SPI_CLK: R22.2 U3.26 | length 4.1
  Top Layer w0.152: R22.2 228.7,251.5 228.847,251.647 228.847,253.164 229.433,253.75 U3.26
SPI_CLK_SRL: R22.1 WIFI1.5 | length 21.9
  Top Layer w0.152: WIFI1.5 212.761,242.761 213.185,243.185 216.523,243.185 218.295,244.957 218.295,247.556 218.121,247.73 218.121,248.379 218.624,248.882 218.624,249.124 219.1,249.6 v9(219.102,249.6) ; v6(223.1,250.3) 223.1,250.277 223.924,251.101 225.656,251.101 226.055,251.5 R22.1
  Bottom Layer w0.152: v9(219.102,249.6) 219.348,249.6 219.739,249.991 222.791,249.991 v6(223.1,250.3)
SPI_CS: R16.2 U3.25 WIFI1.16 | length 30.5
  Top Layer w0.152: v9(219.099,250.296) 217.478,250.296 216.748,251.025 WIFI1.16 216.748,257.911 217.284,258.447 222.853,258.447 223.214,258.086 R16.2 ; v6(223.102,251) 223.119,250.983 223.375,250.983 223.798,251.406 225.53,251.406 226.328,252.204 228.354,252.204 228.542,252.392 228.542,253.29 229.502,254.25 U3.25
  Bottom Layer w0.152: v9(219.099,250.296) 222.398,250.296 v6(223.102,251)
SPI_MISO: U3.27 WIFI1.6 | length 25.5
  Top Layer w0.152: WIFI1.6 214.743,242.595 215.028,242.88 216.649,242.88 218.599,244.83 218.599,247.682 218.426,247.856 218.426,248.252 219.099,248.926 v9(219.102,248.926) ; v6(223.1,249.6) 223.1,249.623 223.579,250.102 223.579,250.324 224.051,250.796 229.107,250.796 229.152,250.841 229.152,253.038 229.364,253.25 U3.27
  Bottom Layer w0.152: v9(219.102,248.926) 219.105,248.926 219.865,249.686 223.014,249.686 v6(223.1,249.6)
SPI_MOSI: U3.28 WIFI1.7 | length 23.4
  Top Layer w0.152: WIFI1.7 216.723,242.523 218.904,244.704 v9(218.904,248.054) ; v6(223.1,248.926) 223.102,248.926 223.579,249.402 223.579,249.671 223.883,249.976 223.883,250.198 224.177,250.492 229.234,250.492 229.457,250.715 229.457,252.721 229.485,252.75 U3.28
  Bottom Layer w0.152: v9(218.904,248.054) 218.908,248.054 219.581,248.727 219.581,248.971 219.991,249.381 222.642,249.381 223.098,248.926 v6(223.1,248.926)
SS: C18.1 U1.5 U1.9 | length 11.1
  Top Layer w0.254: C18.1 205.316,228.384 205.533,228.166 U1.5 210.432,228.166 210.631,227.967 211.242,227.967 211.867,227.342 211.867,226.458 211.238,225.83 210.628,225.83 210.425,225.626 U1.9
SW1: C1.1 D3.1 L1.1 M1.1 M1.2 M1.3 M2.5 M2.6 M2.7 M2.8 R2.1 U1.26 | length 34.4
  Top Layer w0.254: U1.26 215.952,229.436 ; R2.1 245.952,232.4 246.726,231.627 L1.1
  Top Layer w0.406: 215.952,229.436 217.576,231.061 C1.1 218.79,231.135 218.79,232.09 219.1,232.4 224,232.4 225.587,230.813 225.587,228.613 v6(226,228.2)
  Bottom Layer w0.406: v6(226,228.2) 229.1,228.2 229.971,227.329 v8(232.6,227.329)
SW2: C2.2 D4.1 L2.1 M3.1 M3.2 M3.3 M4.5 M4.6 M4.7 M4.8 R4.1 U1.16 | length 31.9
  Top Layer w0.254: U1.16 215.729,223.086 216.181,222.635 ; R4.1@239.417,211 245.955,211 246.726,211.771 L2.1
  Top Layer w0.305: 216.181,222.635 217.066,221.75
  Top Layer w0.406: 217.066,221.75 C2.2 219.85,221.75 220.9,220.7 223.452,220.7 v4(225.752,218.4)
  Bottom Layer w0.406: v4(225.752,218.4) 227.152,217 229.007,217 230.172,215.835 v8(232.6,215.835)
SWCLK: CN_DB.6 U3.37 | length 27.4
  Top Layer w0.152: CN_DB.6 225.144,259.73 225.38,259.494 225.38,252.118 225.278,252.016 223.546,252.016 223.313,251.783 222.778,251.783 222.311,251.316 222.311,246.432 222.448,246.295 231.751,246.295 231.885,246.429 U3.37
SWDIO: CN_DB.5 U3.34 | length 23.9
  Top Layer w0.152: CN_DB.5 225.918,259.73 225.685,259.497 225.685,251.992 225.404,251.711 223.672,251.711 223.44,251.479 222.904,251.479 222.624,251.198 222.624,251.19 222.616,251.19 222.616,248.733 222.902,248.447 223.298,248.447 223.579,248.727 223.579,248.971 223.883,249.276 223.883,249.544 224.188,249.849 224.188,250.072 224.303,250.187 229.348,250.187 229.476,250.059 229.476,249.859 229.585,249.75 U3.34
TG1: M1.4 U1.25 | length 25.1
  Top Layer w0.254: v4(216.3,231.6) 216.3,232.461 217.439,233.6 230.1,233.6 233.025,230.675 M1.4
  Top Layer w0.279: U1.25 214.949,228.8 v4(216.3,228.8)
  Bottom Layer w0.254: v4(216.3,228.8) v4@216.3,231.419 ; v4(216.3,231.6) v4@216.3,231.419 ; v4@216.481,231.6 v4@216.3,231.419
TG2: M3.4 U1.17 | length 20.9
  Top Layer w0.254: U1.17 216.115,223.721 216.984,222.852 v4(217.41,222.852) ; v4(220.148,222.852) 221.55,221.45 224.138,221.45 226.188,219.4 v4(226.4,219.4) ; v8(232.2,218.612) 232.798,218.612 233.025,218.385 M3.4
  Bottom Layer w0.254: v4(217.41,222.852) v4(220.148,222.852) ; v4(226.4,219.4) 227.455,219.4 228.243,218.612 v8(232.2,218.612)
TH1: C99.2 R15.1 U3.16 | length 6.5
  Top Layer w0.152: U3.16 235.885,256.546 236.57,257.23 C99.2 236.57,259.97 236.984,260.384 R15.1
TX0: CN_DB.9 WIFI1.22 | length 11.3
  Top Layer w0.152: WIFI1.22 205.666,256.539 205.904,256.778 205.904,257.864 206.107,258.067 207.298,258.067 207.678,258.447 209.967,258.447 210.271,258.751 213.101,258.751 CN_DB.9
TX1: CN_DB.2 U3.21 | length 12.5
  Top Layer w0.152: CN_DB.2 227.454,261.596 227.849,261.596 228.302,261.143 233.174,261.143 233.5,260.816 233.5,256.762 233.385,256.647 U3.21
VCC3_3: C11.1 C12.1 C13.1 C24.1 C27.1 C28.1 C29.1 CN_DB.4 LDO1.3 R10.1 R11.1 R13.1 R14.1 R17.1 R18.1 R24.1 U3.9 U3.24 U3.36 U3.48 VCC3_3.1 WIFI1.8 | length 112.3
  Top Layer w0.152: R24.1 231.204,244.9 ; R18.1 236.641,244.9
  Top Layer w0.203: R10.1 203.4,237.9 203.8,237.5 218.355,237.5 218.73,237.875 218.73,238.554 ; 206.404,237.6 R11.1 ; 210.768,237.6 R17.1 ; 236,251.318 236,252.301 236.449,252.75 U3.9 ; R13.1 240.99,246.044 241.3,245.734 241.3,244.9
  Top Layer w0.254: v11(237.385,245.9) U3.48
  Top Layer w0.279: 229.1,248.75 U3.36 ; 231.77,256.884 231.885,256.769 U3.24
  Top Layer w0.406: 231.54,257.114 231.77,256.884
  Top Layer w0.508: v11(227.7,246.9) C29.1 229.1,248.75 ; 231.54,257.114 C28.1 231.54,258.44 231.86,258.76 CN_DB.4@231.86,259.404 ; v8(231.885,254.2) 231.885,251.85 232.418,251.318 236,251.318 236.886,251.318 237.385,250.819 v11(237.385,249)
  Top Layer w0.61: C13.1 220.25,239.786 ; 222.4,240.042 C12.1@223.5,240.042 ; 223.5,241.002 C12.1@223.5,240.042 ; C12.1 C12.1@223.5,240.042
  Top Layer w0.66: 237.385,244.9 v11(237.385,245.9)
  Top Layer w0.711: WIFI1.8 218.73,238.554 C13.1@220.238,238.554 ; 237.385,244.9 C27.1 C24.1 ; C24.1 241.3,244.9 R14.1 243.223,244.9
  Top Layer w0.914: 220.25,239.786 220.507,240.042 222.4,240.042 ; 223.5,241.002 223.5,242.976 225.424,244.9 v14(227.7,244.9) 231.204,244.9 236.641,244.9 237.385,244.9 ; 243.223,244.9 243.908,244.9 ; 243.908,244.9 245.808,243 VCC3_3.1 250.001,243 251.901,244.9 C11.1@251.901,247.094
  Top Layer w0.965: C11.1@251.901,247.094 LDO1.3
  Bottom Layer w0.508: v14(227.7,244.9) v11(227.7,246.9) ; CN_DB.4@231.858,259.73 231.858,254.228 v8(231.885,254.2) ; v11(237.385,245.9) v11(237.385,249)
VCC4_7: C30.1 D5.2 R20.1 U2.1 VCC4_7.1 | length 8.4
  Top Layer w0.406: U2.1 C30.1 261.104,251.996 VCC4_7.1 261.773,251.327 D5.2 R20.1@265.836,251.327
VCC5_7: C4.1 C5.1 C10.1 C16.1 C17.1 C25.1 C26.1 C100.2 C101.1 C102.1 C103.1 J1.1 J2.1 J3.1 J4.1 J5.1 J6.1 L1.2 L2.2 LDO1.1 R1.1 R3.2 R7.2 R20.2 U1.3 U1.11 U1.14 VCC5_7.1 | length 140.9
  Top Layer w0.254: R7.2 R7.2@205.809,224.711 ; v4(206.416,231.6) 206.416,229.2 206.666,228.95 208.184,228.95 208.67,229.436 U1.3 ; C16.1 208.263,224.711 208.618,224.356 U1.11 210.366,224.356 210.623,224.1 210.623,222.7 210.375,222.451 U1.14 ; R1.1 246.118,234.204 246.726,234.812 L1.2 246.726,239.174 245.7,240.2 243.277,240.2 242.6,240.877 242.6,241.284 242.6,241.967 ; R3.2@239.417,209.196 246.146,209.196 246.726,208.616 L2.2
  Top Layer w0.508: R7.2 205.744,223.827 v4(206.249,223.322) ; R7.2@205.809,224.711 C16.1 ; v4(206.416,231.6) 206.416,235.016 208.1,236.7 238.826,236.7 241.026,238.9 v6(242.522,238.9) ; v6(245.022,241.4) v4(253.126,241.4) ; v4(253.126,221.3) v4(253.126,234.5)
  Top Layer w0.965: LDO1.1 C10.1@263.187,242.494
  Top Layer w1.016: C10.1@263.187,242.494 266.194,242.494
  Bottom Layer w0.508: v4(206.249,223.322) 206.249,225.649 206.416,225.816 v4(206.416,231.6) ; v6(242.522,238.9) v6(245.022,241.4) ; v4@253.069,241.4 253.126,241.457 v4(253.126,241.4) v4(253.126,234.5) ; v4(253.126,221.3) v13(262.5,221.3)
VCC24: C3.1 C6.1 C7.1 C8.1 C9.1 M1.5 M1.6 M1.7 M1.8 M3.5 M3.6 M3.7 M3.8 PC24.1 R5.1 VCC24.1
VFB: R7.1 R8.1 U1.4 U1.10 | length 15.7
  Top Layer w0.254: R8.1 R7.1 204.384,225.413 208.171,225.413 208.593,224.991 U1.10 210.443,224.991 210.849,225.398 211.417,225.398 212.299,226.279 212.299,227.521 211.421,228.399 210.81,228.399 210.407,228.801 U1.4
VIN2: C15.1 R5.2 U1.22 | length 15.1
  Top Layer w0.279: U1.22 217.374,226.896 217.914,226.356 219.132,226.356 v4(219.792,227.016)
  Top Layer w0.508: v8(224.628,227.016) 224.628,223.642 225.14,223.129 R5.2
  Bottom Layer w0.508: v4(219.792,227.016) v8(224.628,227.016)
pads on no net: J1.4 J1.5 J1.6 J2.4 J2.5 J2.6 J3.4 J3.5 J3.6 J4.4 J4.5 J4.6 J5.4 J5.5 J5.6 J6.4 J6.5 J6.6 R6.1 U1.1 U1.13 U2.13 U2.16 U3.1 U3.2 U3.3 U3.4 U3.17 U3.18 U3.19 U3.29 U3.30 U3.31 U3.32 U3.33 U3.38 U3.39 U3.41 U3.45 U3.46 WIFI1.2 WIFI1.9 WIFI1.10 WIFI1.11 WIFI1.12 WIFI1.13 WIFI1.14 WIFI1.19 WIFI1.20

## Polygon pours and split planes (outlines as drawn)
VCC5_7 on Top Layer "VOUT_TOP" (solid, remove dead copper, pour order 17): 259.9,238.193 259.9,223.407 260.599,222.708 261.808,222.708 265,225.9 265,251.2 273.1,251.2 273.1,208.3 265,208.3 265,215.4 261.801,218.599 260.549,218.599 259.9,217.95 259.9,203 248.1,203 248.1,207 249.6,208.5 253.8,208.5 253.8,235 249.5,235 248.1,236.4 248.1,240.4 257.693,240.4
GND on Top Layer "PGND_TOP" (solid, remove dead copper, pour order 18): 280,200 280,265 200,265 200,237.5 233.285,237.5 236,234.785 236,200
GND on Top Layer "GND_TOP" (solid, remove dead copper, pour order 20): 200,200 235.405,200 235.405,215.905 235.405,234.365 232.77,237 200,237
SW1 on Top Layer "SW2_TOP" (solid, remove dead copper, pour order 16): 232.316,230.054 248.3,230.054 248.3,224.975 232.316,224.975
SW2 on Top Layer "SW1_TOP" (solid, remove dead copper, pour order 13): 232.316,218.6 248.3,218.6 248.3,213.375 232.316,213.375
VCC24 on Top Layer "VIN_TOP" (solid, pour order 12): 231.8,212.959 231.8,229.7 226.625,229.7 226.625,218.525 225.1,217 213,217 210.6,214.6 210.6,211.5 212.8,209.3 228.15,209.3
GND on Top Layer "GND_JOIN" (solid, pour order 25): 235,228.143 236.5,228.143 236.5,218.167 235,218.167
GND on Bottom Layer "PGND_BOTTOM" (solid, remove dead copper, pour order 22): 280,200 280,265 200,265 200,237.5 233.285,237.5 236,234.785 236,208 236,200
GND on Bottom Layer "GND_JOIN" (solid, pour order 27): 235,226.454 236.5,226.454 236.5,218.1 235,218.1
GND on Bottom Layer "GND_BOTTOM" (solid, remove dead copper, pour order 24): 200,200 235.405,200 235.405,215.905 235.405,234.365 232.77,237 200,237

## Keep-outs
Keep-Out Layer:
  the board outline again, w0

## Silkscreen, mask and mechanical layers (free items; w line width, h text height)
Top Overlay:
  circle w0.127: c204,261 r3
  circle w0.127: c276,261 r3
  circle w0.127: c276,204 r3
  circle w0.127: c204,204 r3
  lines w0.127: 238.466,240.666 239.337,242.34 ; 234.6,262 259.7,262 259.7,264.6 234.6,264.6 234.6,262
  lines w0.305: 242.643,240.835 243.277,240.2 245,240.2
  text "GND" at 236.5,264.259 h0.61 r180
  text "GND" at 239.022,264.259 h0.61 r180
  text "GND" at 241.544,264.259 h0.61 r180
  text "GND" at 244.067,264.259 h0.61 r180
  text "GND" at 246.589,264.259 h0.61 r180
  text "GND" at 249.111,264.259 h0.61 r180
  text "RX" at 251.633,264.259 h0.61 r180
  text "TX" at 254.156,264.259 h0.61 r180
  text "GND" at 256.678,264.259 h0.61 r180
  text "RST" at 259.2,264.259 h0.61 r180
  text "GND" at 236.5,262.918 h0.61 r180
  text "RTS" at 239.022,262.918 h0.61 r180
  text "TXE" at 241.544,262.918 h0.61 r180
  text "RXE" at 244.067,262.918 h0.61 r180
  text "DTR" at 246.589,262.918 h0.61 r180
  text "GND" at 249.111,262.918 h0.61 r180
  text "SCK" at 251.938,262.918 h0.61 r180
  text "SIO" at 254.409,262.918 h0.61 r180
  text "GND" at 256.678,262.918 h0.61 r180
  text "VCC" at 259.2,262.918 h0.61 r180
Bottom Overlay:
  lines w0.127: 206.452,245.5 216.5,245.5 216.5,252.6 206.452,252.6 206.452,245.5
  text "v.Version" at 215.951,245.863 h0.64
  text "WiFi Christmas / Tree Lights / Controller 3000 / XL Pro S+ 6" at 216.1,245.673 h0.66

## Dimensions
204,200 to 204,265 on Mechanical 2
200,204 to 280,204 on Mechanical 2
276,261 to 280,261 on Mechanical 2
276,265 to 276,261 on Mechanical 2
204,261 to 209,262.27 on Mechanical 2
229,204 to 204,204 on Mechanical 2
268,204.1 to 276,204 on Mechanical 2
229,240 to 204,261 on Mechanical 2